# Altium PCB PCB.PcbDoc
Units mil, origin at the board's own origin, x right, y up, seen from the top; angles counter-clockwise.
Board outline 1650 x 4050 mil, 4 copper layers (Top Layer, VCC, GND, Bottom Layer), stack 63.228 mil thick; 28 components, 123 nets, 324 pads, 60 vias.
Unrouted connection lines stored in the file: 78.
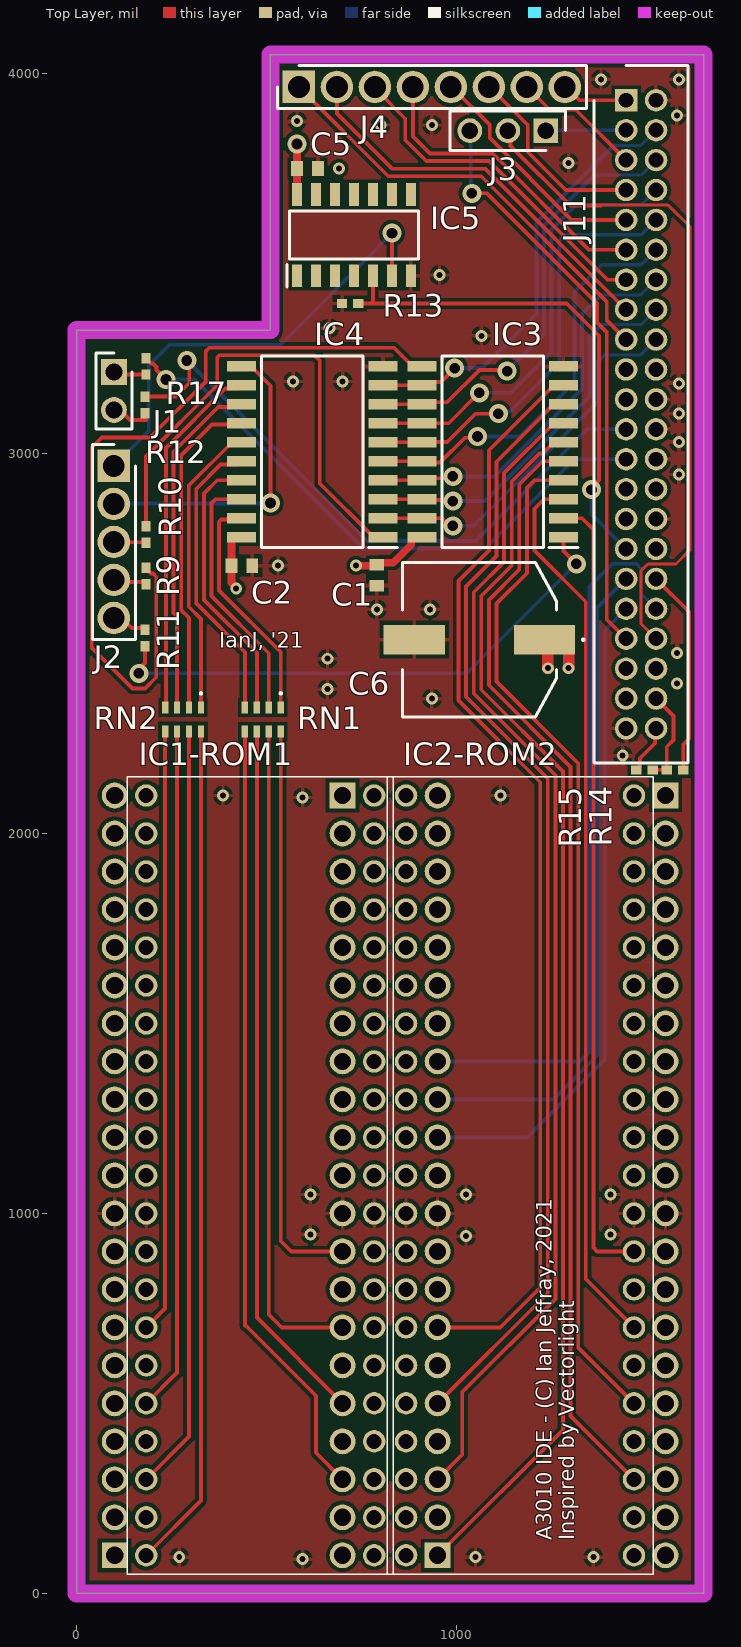
[diagram p0: Top Layer view]
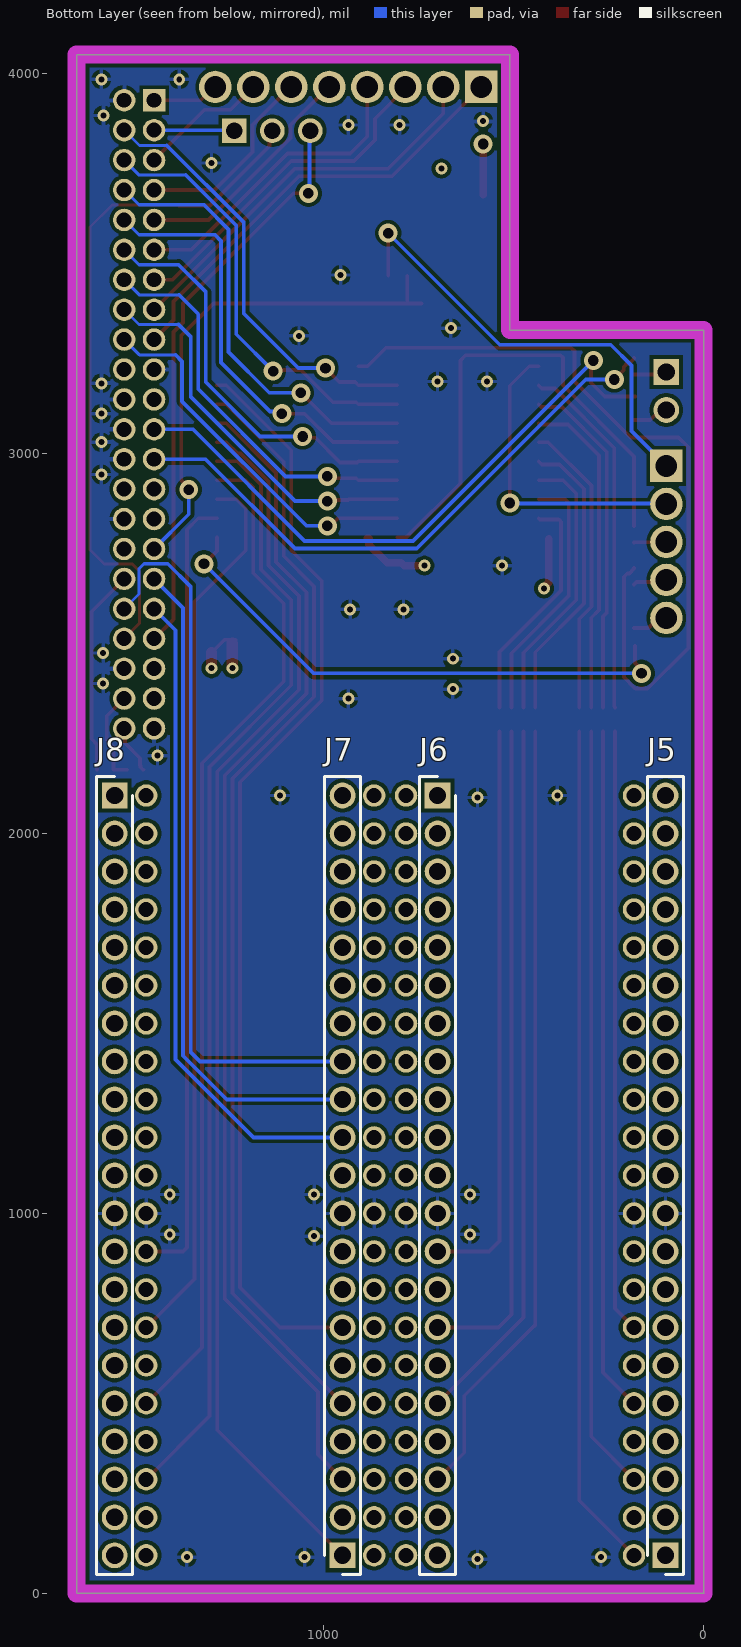
[diagram p1: Bottom Layer view, seen from below]
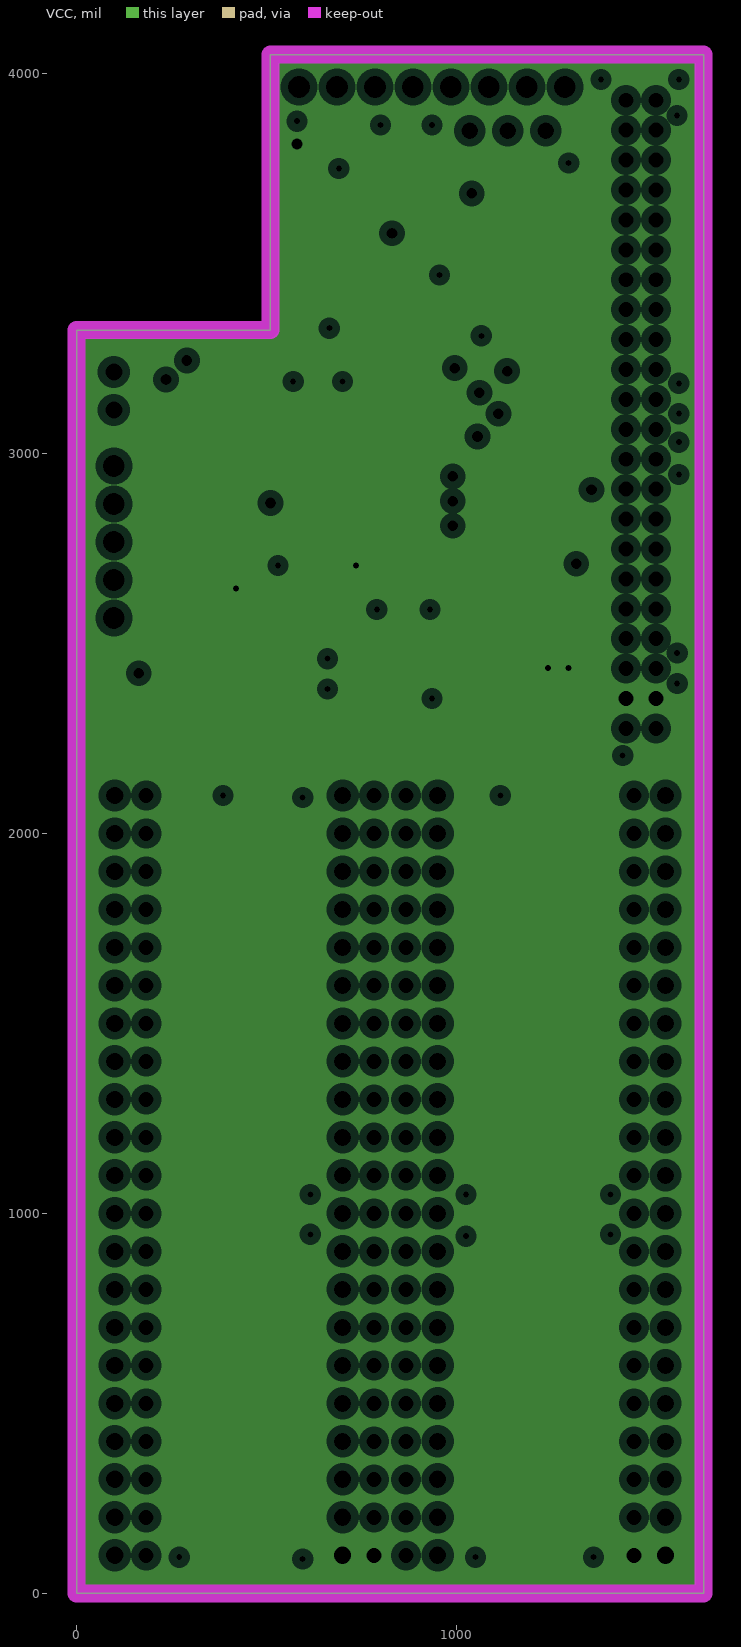
[diagram p2: VCC, clearances drawn from the general rule]
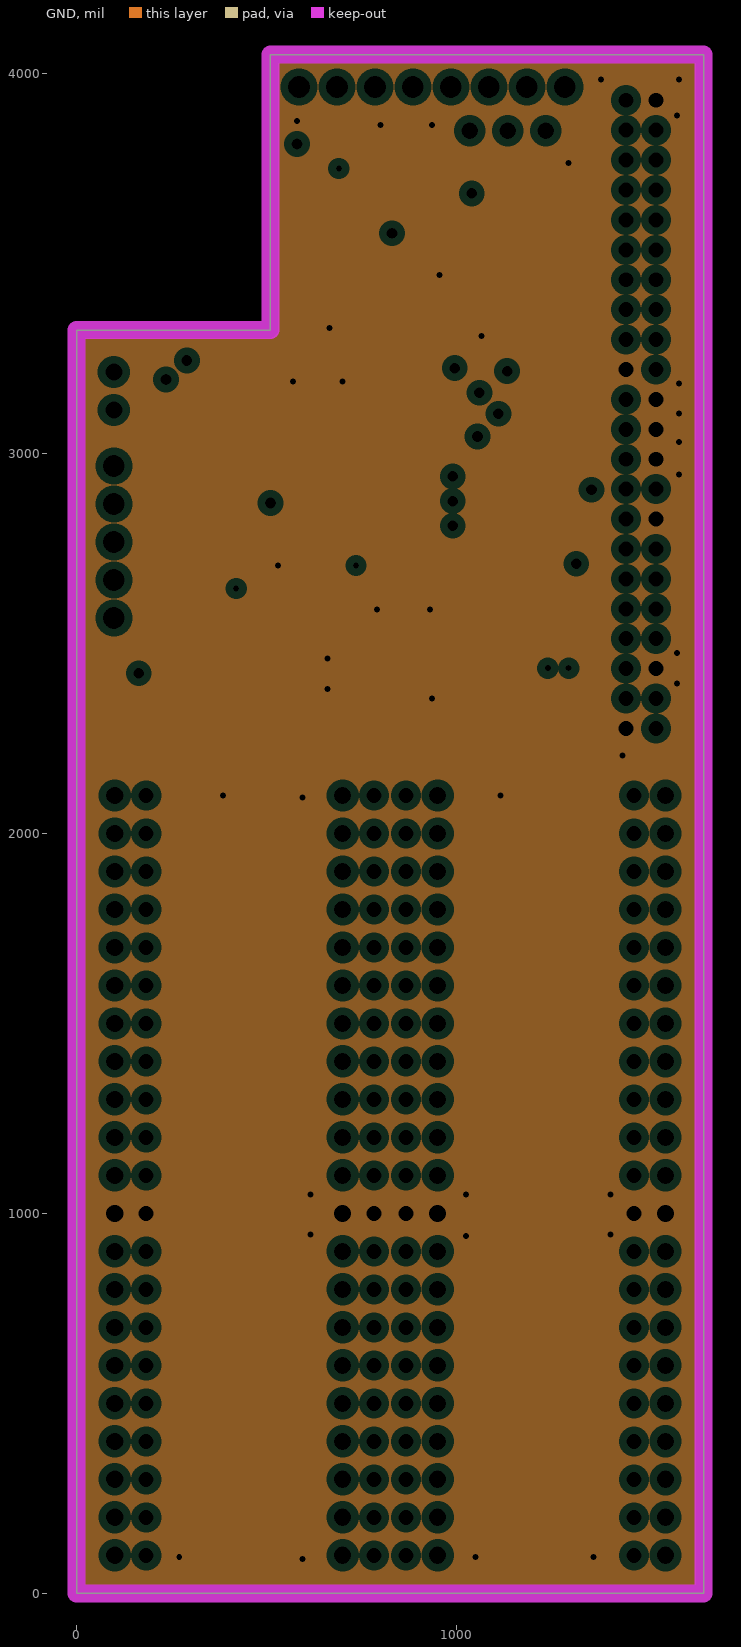
[diagram p3: GND, clearances drawn from the general rule]

## Layer stack, top to bottom
Top Solder: solder mask 0.4, Solder Resist, Dk 3.5
Top Layer: signal copper 1.378
Dielectric 2: prepreg 7.874, PP-006, Dk 4.1
VCC: plane copper 0.7087, net VCC
Dielectric 1: dielectric 43.307, FR-4, Dk 4.8
GND: plane copper 0.7087, net GND
Dielectric 3: prepreg 7.874, PP-006, Dk 4.1
Bottom Layer: signal copper 1.378
Bottom Solder: solder mask 0.4, Solder Resist, Dk 3.5

## Board outline
0,3325 510,3325 510,4050 1650,4050 1650,0 0,0

## Design rules (kind name [scope] priority, off if disabled: settings)
Clearance [All] p1: gap=10 ignorepadtopadclearanceinfootprint=FALSE except(0: Arc-Hole Track-Hole SMDPad-Hole THPad-Hole Via-Hole Fill-Hole Poly-Hole Region-Hole Text-Hole; 5: Arc-Arc Arc-Track Arc-THPad Track-Track Track-THPad)
ComponentClearance [All] p1: gap=5 collisioncheckmode=3 verticalgap=10 showdistances=FALSE
PlaneClearance [All] p1: clearance=20
PlaneConnect [All] p1: planeconnectstyle=Relief reliefexpansion=20 reliefentries=4 reliefconductorwidth=10 reliefairgap=10
PolygonConnect [All] p1: connectstyle=Relief reliefconductorwidth=10 reliefentries=4 polygonreliefangle="90 Angle" airgapwidth=10
RoomDefinition Sheet1 [InComponentClass('Sheet1')] p1: confinementstyle=ConfineIn formatcopy=TRUE lockcomponents=FALSE outline 1710,15 1885,15 1885,170 1710,170
RoutingVias [All] p1: holewidth=28 width=50 viastyle="Through Hole" minholewidth=28 minwidth=50 maxholewidth=28 maxwidth=50
SolderMaskExpansion [All] p1: expansion=4 istentingtop=FALSE
Width [All] p1: maxlimit=10 minlimit=5 preferedwidth=10 minimp=50.000000 maximp=50.000000 favimp=50.000000
27 further rules are at their usual default settings.

## Classes and differential pairs
net class BD[8..15]: BD8 BD9 BD10 BD11 BD12 BD13 BD14 BD15

## Components (designator, comment, footprint, x,y, rotation, side; value= is the part's Value field where it differs from the comment)
C1 "06033C104KAT4A" CAPC1608X90N 790,2680 r270 top
C2 "06033C104KAT4A" CAPC1608X90N 435,2705 r180 top
C5 "06033C104KAT4A" CAPC1608X90N 607.56,3750 r180 top
C6 "EEE-FC1H470P" EEEFK1V331P 1060,2510 r90 top
IC1-ROM1 "4842-6000-CP" 48426000CP 183,2100 r270 top locked
IC2-ROM2 "4842-6000-CP" 48426000CP 867,2100 r270 top locked
IC3 "74HC573D,653" SOIC127P1032X265-20N 1095,3005 r180 top
IC4 "74HCT573D,653" SOIC127P1032X265-20N 620,3005 r180 top
IC5 "74HCT14D-Q100,118" SOIC127P600X175-14N 730,3575 r90 top
J1 "68001-102HLF" HDRV2W67P0X254_1X2_508X241X858P 98.01,3214.83 r270 top locked
J2 "68001-105HLF" HDRV5W90P0X254_1X5_1270X241X1143P 97.74,2967.43 r270 top locked
J3 "861400031YO8LF" HDRV3W63P0X254_1X3_762X254X980P 1235,3850 r180 top
J4 "68001-108HLF" HDRV8W90P0X254_1X8_2032X241X1143P 585,3965 r0 top locked
J5 "68001-121HLF" HDRV21W67P0X254_1X21_5334X241X858P 100,100 r90 bottom locked
J6 "68001-121HLF" HDRV21W67P0X254_1X21_5334X241X858P 700,2100 r270 bottom locked
J7 "68001-121HLF" HDRV21W67P0X254_1X21_5334X241X858P 950,100 r90 bottom locked
J8 "68001-121HLF" HDRV21W67P0X254_1X21_5334X241X858P 1550,2100 r270 bottom locked
J11 "87831-4420" SHDR44W55P200_2X22_4665X630X640P 1446.26,3930 r270 top locked
R9 "CRCW040233R0FKEDC" RESC1005X35N 182.74,2677.43 r270 top
R10 "CRCW040233R0FKEDC" RESC1005X35N 182.74,2787.43 r270 top
R11 "CRCW040233R0FKEDC" RESC1005X35N 180,2515 r90 top
R12 "CRCW04022R87FNED" RESC1005X40N 180,3128.35 r90 top
R13 "CRCW0402110KFKTD" RESC1005X40N 720,3395 r0 top
R14 "CRCW0402110KFKTD" RESC1005X40N 1575,2167 r180 top
R15 "CRCW040214K7FKED" RESC1005X40N 1495,2167 r0 top
R17 "CRCW04022R87FNED" RESC1005X40N 183.01,3229.83 r90 top
RN1 "CAT16-68R0F4LF" CAT1668R0F4LF 490,2300 r180 top
RN2 "CAT16-68R0F4LF" CAT1668R0F4LF 280,2300 r180 top

## Footprints (in the part's own frame and the unit in brackets; to place one, negate y for a bottom-side part, rotate by r counter-clockwise, add the part's x,y. Pads: shape width x height; smd on the part's side, far side on the other; paste and mask are expansions set on the pad)
48426000CP [mm]
  round 1.5 hole 1: 1(0,0) 2(2.54,0) 3(5.08,0) 4(7.62,0) 5(10.16,0) 6(12.7,0) 7(15.24,0) 8(17.78,0) 9(20.32,0) 10(22.86,0) 11(25.4,0) 12(27.94,0) 13(30.48,0) 14(33.02,0) 15(35.56,0) 16(38.1,0) 17(40.64,0) 18(43.18,0) 19(45.72,0) 20(48.26,0) 21(50.8,0) 22(50.8,15.24) 23(48.26,15.24) 24(45.72,15.24) 25(43.18,15.24) 26(40.64,15.24) 27(38.1,15.24) 28(35.56,15.24) 29(33.02,15.24) 30(30.48,15.24) 31(27.94,15.24) 32(25.4,15.24) 33(22.86,15.24) 34(20.32,15.24) 35(17.78,15.24) 36(15.24,15.24) 37(12.7,15.24) 38(10.16,15.24) 39(7.62,15.24) 40(5.08,15.24) 41(2.54,15.24) 42(0,15.24)
  silkscreen extent -1.27,-1.27 52.07,16.51, body extent -1.27,-1.27 52.07,16.51, height 5.43
CAPC1608X90N [mm]
  rect 0.78x0.99 smd: 1(-0.7,0) 2(0.7,0)
  body extent -0.8,-0.41 0.8,0.41, height 0.9
CAT1668R0F4LF [mm]
  rect 0.425x0.8 smd: 1(-1.2,-0.8) 2(-0.4,-0.8) 3(0.4,-0.8) 4(1.2,-0.8) 5(1.2,0.8) 6(0.4,0.8) 7(-0.4,0.8) 8(-1.2,0.8)
  silkscreen extent -1.25,-1.8 -1.15,-1.7, body extent -1.6,-1.16 1.6,1.16, height 0.7
EEEFK1V331P [mm]
  rect 2x4.1 smd: 1(0,-4.35) 2(0,4.35)
  silkscreen extent -5.15,-7 5.15,5.15, body extent -5.15,-5.85 5.15,5.85, height 10.3
HDRV2W67P0X254_1X2_508X241X858P [mm]
  rect 1.725x1.725 hole 1.15: 1(0,0)
  round 1.725 hole 1.15: 2(2.54,0)
  silkscreen extent -1.27,-1.2 3.81,1.2, body extent -1.27,-1.2 3.81,1.2, height 8.58
HDRV3W63P0X254_1X3_762X254X980P [mm]
  rect 1.65x1.65 hole 1.1: 1(0,0)
  round 1.65 hole 1.1: 2(2.54,0) 3(5.08,0)
  silkscreen extent -1.32,-1.32 6.4,1.32, body extent -1.27,-1.27 6.35,1.27, height 9.8
HDRV5W90P0X254_1X5_1270X241X1143P [mm]
  rect 2.175x2.175 hole 1.45: 1(0,0)
  round 2.175 hole 1.45: 2(2.54,0) 3(5.08,0) 4(7.62,0) 5(10.16,0)
  silkscreen extent -1.44,-1.44 11.6,1.44, body extent -1.27,-1.2 11.43,1.2, height 11.43
HDRV8W90P0X254_1X8_2032X241X1143P [mm]
  rect 2.175x2.175 hole 1.45: 1(0,0)
  round 2.175 hole 1.45: 2(2.54,0) 3(5.08,0) 4(7.62,0) 5(10.16,0) 6(12.7,0) 7(15.24,0) 8(17.78,0)
  silkscreen extent -1.44,-1.44 19.22,1.44, body extent -1.27,-1.2 19.05,1.2, height 11.43
HDRV21W67P0X254_1X21_5334X241X858P [mm]
  rect 1.725x1.725 hole 1.15: 1(0,0)
  round 1.725 hole 1.15: 2(2.54,0) 3(5.08,0) 4(7.62,0) 5(10.16,0) 6(12.7,0) 7(15.24,0) 8(17.78,0) 9(20.32,0) 10(22.86,0) 11(25.4,0) 12(27.94,0) 13(30.48,0) 14(33.02,0) 15(35.56,0) 16(38.1,0) 17(40.64,0) 18(43.18,0) 19(45.72,0) 20(48.26,0) 21(50.8,0)
  silkscreen extent -1.27,-1.2 52.07,1.2, body extent -1.27,-1.21 52.07,1.2, height 8.58
RESC1005X35N [mm]
  rect 0.7x0.6 smd: 1(-0.55,0) 2(0.55,0)
  body extent -0.5,-0.25 0.5,0.25, height 0.35
RESC1005X40N [mm]
  rect 0.7x0.6 smd: 1(-0.55,0) 2(0.55,0)
  body extent -0.5,-0.25 0.5,0.25, height 0.4
SHDR44W55P200_2X22_4665X630X640P [mm]
  rect 1.5x1.5 hole 1: 1(0,0)
  round 1.5 hole 1: 2(0,2) 3(2,0) 4(2,2) 5(4,0) 6(4,2) 7(6,0) 8(6,2) 9(8,0) 10(8,2) 11(10,0) 12(10,2) 13(12,0) 14(12,2) 15(14,0) 16(14,2) 17(16,0) 18(16,2) 19(18,0) 20(18,2) 21(20,0) 22(20,2) 23(22,0) 24(22,2) 25(24,0) 26(24,2) 27(26,0) 28(26,2) 29(28,0) 30(28,2) 31(30,0) 32(30,2) 33(32,0) 34(32,2) 35(34,0) 36(34,2) 37(36,0) 38(36,2) 39(38,0) 40(38,2) 41(40,0) 42(40,2) 43(42,0) 44(42,2)
  silkscreen extent -2.32,-2.15 44.32,4.15, body extent -2.32,-2.15 44.33,4.15, height 6.2
SOIC127P600X175-14N [mm]
  rect 1.525x0.65 smd: 1(-2.712,3.81) 2(-2.712,2.54) 3(-2.712,1.27) 4(-2.712,0) 5(-2.712,-1.27) 6(-2.712,-2.54) 7(-2.712,-3.81) 8(2.712,-3.81) 9(2.712,-2.54) 10(2.712,-1.27) 11(2.712,0) 12(2.712,1.27) 13(2.712,2.54) 14(2.712,3.81)
  silkscreen extent -3.47,-4.33 1.6,4.48, body extent -3,-4.33 3,4.33, height 1.75
SOIC127P1032X265-20N [mm]
  rect 1.95x0.7 smd: 1(-4.725,5.715) 2(-4.725,4.445) 3(-4.725,3.175) 4(-4.725,1.905) 5(-4.725,0.635) 6(-4.725,-0.635) 7(-4.725,-1.905) 8(-4.725,-3.175) 9(-4.725,-4.445) 10(-4.725,-5.715) 11(4.725,-5.715) 12(4.725,-4.445) 13(4.725,-3.175) 14(4.725,-1.905) 15(4.725,-0.635) 16(4.725,0.635) 17(4.725,1.905) 18(4.725,3.175) 19(4.725,4.445) 20(4.725,5.715)
  silkscreen extent -5.7,-6.4 3.4,6.42, body extent -5.16,-6.4 5.16,6.4, height 2.65

## Part data
C1 C2 C5: "Capacitor", Manufacturer_Name=AVX, Mouser Part Number=581-06033C104KAT4A, Arrow Part Number=06033C104KAT4A, Arrow Price/Stock=https://www.arrow.com/en/products/06033c104kat4a/avx?region=nac, Datasheet Link=http://www.mouser.com/catalog/supplier/library/pdf/AVXSurfaceMountCeramic.pdf, Height=0.9mm, Manufacturer_Part_Number=06033C104KAT4A, Mouser Price/Stock=https://www.mouser.co.uk/ProductDetail/AVX/06033C104KAT4A?qs=8C2chATdSPiv3E9zfPZulg%3D%3D
C6: "Capacitor Polarised", Manufacturer_Name=Panasonic, Mouser Part Number=667-EEE-FC1H470P, Datasheet Link=http://industrial.panasonic.com/cdbs/www-data/pdf/RDE0000/ABA0000C1172.pdf, Manufacturer_Part_Number=EEE-FC1H470P, Mouser Price/Stock=https://www.mouser.co.uk/ProductDetail/Panasonic/EEE-FC1H470P?qs=qE6bgDGEOCtEzZmCp2ET%2Fg%3D%3D
IC1-ROM1 IC2-ROM2: "Connector", Manufacturer_Name=3M, Mouser Part Number=517-4842-6000-CP, Datasheet Link=https://componentsearchengine.com/Datasheets/1/4842-6000-CP.pdf, Height=5.334mm, Manufacturer_Part_Number=4842-6000-CP, Mouser Price/Stock=https://www.mouser.com/Search/Refine.aspx?Keyword=517-4842-6000-CP
IC3: "Integrated Circuit", Manufacturer_Name=Nexperia, Mouser Part Number=771-74HC573D-T, Arrow Part Number=74HC573D,653, Arrow Price/Stock=https://www.arrow.com/en/products/74hc573d653/nexperia?region=asia, Datasheet Link=https://assets.nexperia.com/documents/data-sheet/74HC_HCT573.pdf, Height=2.65mm, Manufacturer_Part_Number=74HC573D,653, Mouser Price/Stock=https://www.mouser.co.uk/ProductDetail/Nexperia/74HC573D653?qs=P62ublwmbi8WfKX2wZR8SA%3D%3D
IC4: "Integrated Circuit", Manufacturer_Name=Nexperia, Mouser Part Number=771-HCT573D653, Arrow Part Number=74HCT573D,653, Arrow Price/Stock=https://www.arrow.com/en/products/74hct573d653/nexperia, Datasheet Link=https://assets.nexperia.com/documents/data-sheet/74HC_HCT573.pdf, Height=2.65mm, Manufacturer_Part_Number=74HCT573D,653, Mouser Price/Stock=https://www.mouser.co.uk/ProductDetail/Nexperia/74HCT573D653?qs=me8TqzrmIYW0cewPmm%252By%2Fg%3D%3D
IC5: "Integrated Circuit", Manufacturer_Name=Nexperia, Mouser Part Number=771-74HCT14D-Q100118, Arrow Part Number=74HCT14D-Q100,118, Arrow Price/Stock=https://www.arrow.com/en/products/74hct14d-q100118/nexperia?region=nac, Datasheet Link=https://assets.nexperia.com/documents/data-sheet/74HC_HCT14_Q100.pdf, Height=1.75mm, Manufacturer_Part_Number=74HCT14D-Q100,118, Mouser Price/Stock=https://www.mouser.com/Search/Refine.aspx?Keyword=771-74HCT14D-Q100118
J1: "Connector", Manufacturer_Name=Amphenol, Mouser Part Number=649-68001-102HLF, Arrow Part Number=68001-102HLF, Arrow Price/Stock=https://www.arrow.com/en/products/68001-102hlf/amphenol-fci, Datasheet Link=https://cdn.amphenol-icc.com/media/wysiwyg/files/drawing/68000.pdf, Height=8.58mm, Manufacturer_Part_Number=68001-102HLF, Mouser Price/Stock=https://www.mouser.co.uk/ProductDetail/Amphenol-FCI/68001-102HLF/?qs=U4OZ2mbKj8feu9tJlaXIaQ%3D%3D
J2: "Connector", Manufacturer_Name=Amphenol, Mouser Part Number=649-68001-105HLF, Arrow Part Number=68001-105HLF, Arrow Price/Stock=https://www.arrow.com/en/products/68001-105hlf/amphenol-fci, Datasheet Link=https://datasheet.datasheetarchive.com/originals/distributors/Datasheets_SAMA/c5633c0073cf34d35a9dcd840869dfda.pdf, Height=11.43mm, Manufacturer_Part_Number=68001-105HLF, Mouser Price/Stock=https://www.mouser.com/Search/Refine.aspx?Keyword=649-68001-105HLF
J3: "Connector", Manufacturer_Name=Amphenol, Mouser Part Number=649-861400031YO8LF, Arrow Part Number=861400031YO8LF, Arrow Price/Stock=https://www.arrow.com/en/products/861400031yo8lf/amphenol-fci, Datasheet Link=https://cdn.amphenol-icc.com/media/wysiwyg/files/drawing/c-8614-0089.pdf, Height=9.8mm, Manufacturer_Part_Number=861400031YO8LF, Mouser Price/Stock=https://www.mouser.com/Search/Refine.aspx?Keyword=649-861400031YO8LF
J4: "Connector", Manufacturer_Name=Amphenol, Mouser Part Number=649-68001-108HLF, Arrow Part Number=68001-108HLF, Arrow Price/Stock=https://www.arrow.com/en/products/68001-108hlf/amphenol-fci?region=nac, Datasheet Link=https://datasheet.datasheetarchive.com/originals/distributors/Datasheets_SAMA/c5633c0073cf34d35a9dcd840869dfda.pdf, Height=11.43mm, Manufacturer_Part_Number=68001-108HLF, Mouser Price/Stock=https://www.mouser.co.uk/ProductDetail/Amphenol-FCI/68001-108HLF?qs=QKvFUfBIyQKXzKR4Fn7cFQ%3D%3D
J5 J6 J7 J8: "Connector", Manufacturer_Name=Amphenol, Mouser Part Number=649-68001-121HLF, Arrow Part Number=68001-121HLF, Arrow Price/Stock=https://www.arrow.com/en/products/68001-121hlf/amphenol-fci?region=nac, Datasheet Link=https://datasheet.datasheetarchive.com/originals/distributors/Datasheets_SAMA/c5633c0073cf34d35a9dcd840869dfda.pdf, Height=8.58mm, Manufacturer_Part_Number=68001-121HLF, Mouser Price/Stock=https://www.mouser.co.uk/ProductDetail/Amphenol-FCI/68001-121HLF/?qs=QKvFUfBIyQK%252BoxmWjqVzjQ%3D%3D
J11: "Connector", Manufacturer_Name=Molex, Mouser Part Number=538-87831-4420, Datasheet Link=https://datasheet.datasheetarchive.com/originals/distributors/Datasheets-DGA22/2095109.pdf, Height=6.4mm, Manufacturer_Part_Number=87831-4420, Mouser Price/Stock=https://www.mouser.co.uk/ProductDetail/Molex/87831-4420?qs=tYx%252BZc2nXqqGnHzye8Wn9w%3D%3D
R9 R10 R11: "Resistor", Manufacturer_Name=Vishay, Mouser Part Number=71-CRCW040233R0FKEDC, Arrow Part Number=CRCW040233R0FKEDC, Arrow Price/Stock=https://www.arrow.com/en/products/crcw040233r0fkedc/vishay?region=nac, Datasheet Link=http://www.vishay.com/docs/28773/crcwce3.pdf, Height=0.35mm, Manufacturer_Part_Number=CRCW040233R0FKEDC, Mouser Price/Stock=https://www.mouser.co.uk/ProductDetail/Vishay-Dale/CRCW040233R0FKEDC?qs=E3Y5ESvWgWMDHctUwHh1hg%3D%3D
R12 R17: "Resistor", Manufacturer_Name=Vishay, Mouser Part Number=71-CRCW04022R87FNED, Datasheet Link=http://www.vishay.com/docs/20035/dcrcwe3.pdf, Height=0.4mm, Manufacturer_Part_Number=CRCW04022R87FNED, Mouser Price/Stock=https://www.mouser.com/Search/Refine.aspx?Keyword=71-CRCW04022R87FNED
R13 R14: "Resistor", Manufacturer_Name=Vishay, Mouser Part Number=71-CRCW0402-110K, Arrow Part Number=CRCW0402110KFKTD, Arrow Price/Stock=https://www.arrow.com/en/products/crcw0402110kfktd/vishay, Datasheet Link=http://www.vishay.com/docs/20035/dcrcwe3.pdf, Height=0.4mm, Manufacturer_Part_Number=CRCW0402110KFKTD, Mouser Price/Stock=https://www.mouser.co.uk/ProductDetail/Vishay-Dale/CRCW0402110KFKTD/?qs=uFJqmf%2F3rbaGBLbzqPTJ0w%3D%3D
R15: "Resistor", Manufacturer_Name=Vishay, Mouser Part Number=71-CRCW0402-14.7K-E3, Datasheet Link=http://www.vishay.com/docs/20035/dcrcwe3.pdf, Height=0.4mm, Manufacturer_Part_Number=CRCW040214K7FKED, Mouser Price/Stock=https://www.mouser.com/Search/Refine.aspx?Keyword=71-CRCW0402-14.7K-E3
RN1 RN2: "Resistor Network", Manufacturer_Name=Bourns, Mouser Part Number=652-CAT16-68R0F4LF, Datasheet Link=https://www.mouser.com/datasheet/2/54/CATCAY-777361.pdf, Height=0.6mm, Manufacturer_Part_Number=CAT16-68R0F4LF, Mouser Price/Stock=https://www.mouser.co.uk/ProductDetail/Bourns/CAT16-68R0F4LF?qs=2cU%252Bdy8NdRpfh4EnG7Hj3A%3D%3D

## Via types
v1: diameter 31.5, hole 15.75, Top Layer to Bottom Layer, 43 vias
v2: diameter 50, hole 28, Top Layer to Bottom Layer, 17 vias

## Nets (pads, with @x,y where several pads share a name; then routed paths per layer and width w, separated by ;. In a path a pad name is that pad's centre, name@x,y a point inside that pad or via, vN(x,y) a via of type N, cw(c..) or ccw(c..) an arc to the next point about the centre after c; other vN are vias at no path point)
BD0: J4.1 J11.17 | length 1165.2
  Top Layer w10: J4.1 820,3730 1065,3730 1395,3400 1395,3351.34 J11.17
BD1: J4.2 J11.15 | length 1045.1
  Top Layer w10: J4.2 685,3895 830,3750 1075.08,3750 J11.15
BD2: J4.3 J11.13 | length 906.6
  Top Layer w10: J4.3 785,3961.52 865,3881.52 865,3825 920,3770 1085,3770 1397.44,3457.56 J11.13
BD3: J4.4 J11.11 | length 815
  Top Layer w10: J4.4 885,3835 930,3790 1095,3790 1348.7,3536.3 J11.11
BD4: J4.5 J11.9 | length 626.3
  Top Layer w10: J4.5 987.15,3965 1087.52,3864.63 1087.52,3830.33 1302.81,3615.04 J11.9
BD5: J4.6 J11.7 | length 515.3
  Top Layer w10: J4.6 1087.15,3965 1187.52,3864.63 1187.52,3793.48 1287.22,3693.78 J11.7
BD6: J4.7 J11.5 | length 341
  Top Layer w10: J4.7 1245,3905 1313.78,3905 J11.5
BD8: IC3.12 IC4.9 J11.4 | length 1137.6
  Top Layer w10: IC4.9 IC3.12 917.76,3188.78 958.78,3188.78 v2(995,3225)
  Bottom Layer w8: 1413.03,3811.03 1444.99,3811.03 cw(c1446.26,3772.52) 1447.53,3811.03 1484.77,3811.03 J11.4
  Bottom Layer w10: v2(995,3225) 1067,3225 1210,3368 1210,3608 1413.03,3811.03
BD9: IC3.13 IC4.8 J11.6 | length 1155.1
  Top Layer w10: IC4.8 IC3.13 913.98,3135 975,3135 1060,3220 1130,3220 v2(1133,3217)
  Bottom Layer w8: 1363,3733 1485.48,3733 J11.6
  Bottom Layer w10: v2(1133,3217) 1230,3314 1230,3600 1363,3733
BD10: IC3.14 IC4.7 J11.8 | length 1162.4
  Top Layer w10: IC4.7 IC3.14 979.18,3080 1059.18,3160 v2(1060,3160)
  Bottom Layer w8: 1315,3655 1486.22,3655 J11.8
  Bottom Layer w10: v2(1060,3160) 1143,3160 1250,3267 1250,3590 1315,3655
BD11: IC3.15 IC4.6 J11.10 | length 1148.8
  Top Layer w10: IC4.6 IC3.15 909.56,3030.58 975.58,3030.58 1050,3105 v2(1110,3105)
  Bottom Layer w8: 1286,3576 1485.96,3576 J11.10
  Bottom Layer w10: v2(1110,3105) 1115.78,3110.78 1140.78,3110.78 1270,3240 1270,3560 1286,3576
BD12: IC3.16 IC4.5 J11.12 | length 1091.2
  Top Layer w10: IC4.5 IC3.16 912.47,2976.5 956.5,2976.5 1021.72,3041.72 1051.72,3041.72 v2(1055,3045)
  Bottom Layer w8: 1382,3497 1485.7,3497 J11.12
  Bottom Layer w10: v2(1055,3045) 1167.13,3045 1310,3187.87 1310,3425 1382,3497
BD13: IC3.17 IC4.4 J11.14 | length 1052.9
  Top Layer w10: IC4.4 IC3.17 913.98,2935 985,2935 v2(990,2940)
  Bottom Layer w8: 1381,3418 1485.44,3418 J11.14
  Bottom Layer w10: v2(990,2940) 1100,2940 1330,3170 1330,3367 1381,3418
BD14: IC3.18 IC4.3 J11.16 | length 1022.3
  Top Layer w10: IC4.3 IC3.18 933.58,2880 936.08,2877.5 987.5,2877.5 v2(990,2875)
  Bottom Layer w8: 1382,3340 1486.18,3340 J11.16
  Bottom Layer w10: v2(990,2875) 1075,2875 1350,3150 1350,3308 1382,3340
BD15: IC3.19 IC4.2 J11.18 | length 991.8
  Top Layer w10: IC4.2 IC3.19 962.36,2830 982.36,2810 v2(990,2810)
  Bottom Layer w8: 1390,3260 1484.92,3260 J11.18
  Bottom Layer w10: v2(990,2810) 1045,2810 1372.5,3137.5 1372.5,3242.5 1390,3260
Bpn: IC4.11 J2.2 | length 819.2
  Top Layer w10: IC4.11 458.58,3230 510,3178.58 v2(510,2870)
  Bottom Layer w10: J2.2 99.02,2868.71 508.71,2868.71 v2(510,2870)
D8: IC1-ROM1.15 J5.7 RN2.5 | length 1589.1
  Top Layer w10: IC1-ROM1.15 232.76,749.76 RN2.5
D9: IC1-ROM1.17 J5.5 RN2.6 | length 1802.2
  Top Layer w10: IC1-ROM1.17 264.25,581.25 RN2.6
D10: IC1-ROM1.19 J5.3 RN2.7 | length 2015.2
  Top Layer w10: IC1-ROM1.19 295.75,412.75 RN2.7
D11: IC1-ROM1.21 J5.1 RN2.8 | length 2228.3
  Top Layer w10: IC1-ROM1.21 327.24,244.24 RN2.8
D12: IC1-ROM1.24 J6.19 RN1.5 | length 2076.4
  Top Layer w10: RN1.5 442.76,705 445,705 630,520 630,370 J6.19
D13: IC1-ROM1.26 J6.17 RN1.6 | length 1862
  Top Layer w10: RN1.6 474.25,725.75 J6.17
D14: IC1-ROM1.28 J6.15 RN1.7 | length 1742.7
  Top Layer w10: RN1.7 505.75,734.25 540,700 J6.15
D15: IC1-ROM1.30 J6.13 RN1.8 | length 1515
  Top Layer w10: RN1.8 537.24,927.76 565,900 J6.13
D24: IC2-ROM2.15 IC3.9 J7.7 | length 2906.3
  Top Layer w10: J7.7 1115,700 1220,805 1220,2135 1005,2350 1005,2665 1085,2745 1085,3008.58 1256.42,3180 IC3.9
D25: IC2-ROM2.17 IC3.8 J7.5 | length 2959.6
  Top Layer w10: J7.5 1240,790 1240,2145 1025,2360 1025,2650 1105,2730 1105,2978.58 1256.42,3130 IC3.8
D26: IC2-ROM2.19 IC3.7 J7.3 | length 3109.6
  Top Layer w10: J7.3 1015,365 1015,530 1260,775 1260,2153.28 1045,2368.28 1045,2635 1125,2715 1125,2948.58 1256.42,3080 IC3.7
D27: IC2-ROM2.21 IC3.6 J7.1 | length 3264.3
  Top Layer w10: J7.1 1280,430 1280,2163.28 1065,2378.28 1065,2625 1145,2705 1145,2926.57 1218.43,3000 1226.42,3000 1256.42,3030 IC3.6
D28: IC2-ROM2.24 IC3.5 J8.19 | length 2951.2
  Top Layer w10: IC3.5 1226.72,2980 1165,2918.28 1165,2695 1085,2615 1085,2390 1300,2175 1300,467 IC2-ROM2.24
D29: IC2-ROM2.26 IC3.4 J8.17 | length 2697.4
  Top Layer w10: IC3.4 1205,2930 1185,2910 1185,2685 1105,2605 1105,2400 1320,2185 1320,647 IC2-ROM2.26
D30: IC2-ROM2.28 IC3.3 J8.15 | length 2349.9
  Top Layer w10: IC3.3 1230,2880 1205,2855 1205,2745 1340,2610 1340,827 IC2-ROM2.28
D31: IC2-ROM2.30 IC3.2 J8.13 | length 2092.5
  Top Layer w10: IC3.2 1330,2830 1360,2800 1360,910 1370,900 IC2-ROM2.30
E_Rben: J2.3 R10.2 | length 85.7
  Top Layer w10: J2.3 98.56,2766.6 181.91,2766.6 R10.2
E_Wben: J2.5 R11.2 | length 96
  Top Layer w10: J2.5 118.2,2567.43 144.86,2540.78 R11.2@182.74,2540.78
E_Wbln: J2.4 R9.2 | length 89.8
  Top Layer w10: J2.4 103.56,2661.6 176.91,2661.6 R9.2
GND: C1.2 C2.1 C5.1 C6.2 IC1-ROM1.12 IC1-ROM1.31 IC2-ROM2.12 IC2-ROM2.31 IC3.10 IC4.10 IC5.7 J5.10 J6.12 J7.10 J8.12 J11.2 J11.19 J11.22 J11.24 J11.26 J11.30 J11.40 J11.43 R13.1
  other v1: 595,90 270,95 1050,95 1360,95 1025,940 615,945 1405,945 615,1050 1025,1050 1405,1050 595,2095 385,2100 1115,2100 1437.33,2205 935,2355 660,2380 1580.63,2395 660,2460 1580.63,2475 790,2590 930,2590 530,2705 1585,2945 1585,3030 1585,3105 1585,3185 570,3190 700,3190 1065,3310 665,3330 955,3470 1295,3765 800,3865 935,3865 580,3875 1580,3890 1380,3985 1585,3985
HDsc0n: J3.3 J11.37 | length 1531.1
  Top Layer w10: v2(1040,3685) 1080,3685 1370,3395 1370,3345 1395,3320 1395,2563.94 1397.93,2561.01 J11.37
  Bottom Layer w10: J3.3 1037.5,3847.5 1037.5,3687.5 v2(1040,3685)
HDsc1n: J3.2 J11.38 | length 1802.2
  Top Layer w8: 1381,3653 1382,3654 1557,3654 1614.75,3596.25 1614.75,2746.75 1577.53,2709.53 1503.53,2709.53 1485,2691 1485,2552.68 J11.38
  Top Layer w10: J3.2 1142.07,3842.93 1142.07,3809.93 1299,3653 1381,3653
I_IntRq: IC5.5 J11.31 R13.2 | length 1351.4
  Top Layer w10: R13.2 774.14,3395 ; IC5.5 780,3400.86 774.14,3395 ; v2(1355,2905) 1355,2910.86 1375,2930.86 1375,3310 1290,3395 774.14,3395
  Bottom Layer w10: v2(1355,2905) 1355,2840.16 J11.31
I_IORn: J11.25 R17.2 | length 1574.2
  Top Layer w10: R17.2 183.01,3249.51 195.57,3236.95 201.03,3236.95 209.82,3228.17 209.82,3220.18 v2(235,3195)
  Bottom Layer w10: v2(235,3195) 310,3195 755,2750 1075.65,2750 1310.77,2985.12 J11.25
I_IOWn: J11.23 R12.2 | length 1667.6
  Top Layer w10: R12.2 260,3150 296.57,3186.57 296.57,3238.43 v2(290,3245)
  Bottom Layer w10: v2(290,3245) 765,2770 1050,2770 1343.86,3063.86 J11.23
IDEd7: J3.1 J11.3 | length 211.8
  Bottom Layer w10: J3.1 1236.26,3851.26 J11.3
IOCSn: J11.32
IORn: J1.1 R17.1 | length 87.8
  Top Layer w10: J1.1 104.66,3208.17 R17.1
IOWn: J1.2 R12.1 | length 96
  Top Layer w10: J1.2 113.68,3114.83 140.33,3088.17 183.01,3088.17
Ip3n: IC5.6 J2.1 | length 1198.9
  Top Layer w10: IC5.6 v2(830,3580)
  Bottom Layer w10: J2.1 189.79,3059.48 189.79,3232.14 244.02,3286.38 536.38,3286.38 v2(830,3580)
LA2: IC2-ROM2.10 J7.12 J11.35 | length 1734.6
  Bottom Layer w10: J7.12 1185,1200 1390,1405 1390,2535.16 J11.35
LA3: IC2-ROM2.9 J7.13 J11.33 | length 1754.4
  Bottom Layer w10: J7.13 1255,1300 1370,1415 1370,2593.9 J11.33
LA4: IC2-ROM2.8 J7.14 J11.36 | length 1923.3
  Bottom Layer w8: 1410.12,2710 1473,2710 1486,2697 1486,2630.42 J11.36
  Bottom Layer w10: J7.14 1325,1400 1350,1425 1350,2649.88 1410.12,2710
NetIC1-ROM1_1: IC1-ROM1.1 J5.21
NetIC1-ROM1_2: IC1-ROM1.2 J5.20
NetIC1-ROM1_3: IC1-ROM1.3 J5.19
NetIC1-ROM1_4: IC1-ROM1.4 J5.18
NetIC1-ROM1_5: IC1-ROM1.5 J5.17
NetIC1-ROM1_6: IC1-ROM1.6 J5.16
NetIC1-ROM1_7: IC1-ROM1.7 J5.15
NetIC1-ROM1_8: IC1-ROM1.8 J5.14
NetIC1-ROM1_9: IC1-ROM1.9 J5.13
NetIC1-ROM1_10: IC1-ROM1.10 J5.12
NetIC1-ROM1_11: IC1-ROM1.11 J5.11
NetIC1-ROM1_13: IC1-ROM1.13 J5.9
NetIC1-ROM1_14: IC1-ROM1.14 J5.8
NetIC1-ROM1_16: IC1-ROM1.16 J5.6
NetIC1-ROM1_18: IC1-ROM1.18 J5.4
NetIC1-ROM1_20: IC1-ROM1.20 J5.2
NetIC1-ROM1_23: IC1-ROM1.23 J6.20
NetIC1-ROM1_25: IC1-ROM1.25 J6.18
NetIC1-ROM1_27: IC1-ROM1.27 J6.16
NetIC1-ROM1_29: IC1-ROM1.29 J6.14
NetIC1-ROM1_32: IC1-ROM1.32 J6.11
NetIC1-ROM1_33: IC1-ROM1.33 J6.10
NetIC1-ROM1_34: IC1-ROM1.34 J6.9
NetIC1-ROM1_35: IC1-ROM1.35 J6.8
NetIC1-ROM1_36: IC1-ROM1.36 J6.7
NetIC1-ROM1_37: IC1-ROM1.37 J6.6
NetIC1-ROM1_38: IC1-ROM1.38 J6.5
NetIC1-ROM1_39: IC1-ROM1.39 J6.4
NetIC1-ROM1_40: IC1-ROM1.40 J6.3
NetIC1-ROM1_41: IC1-ROM1.41 J6.2
NetIC1-ROM1_42: IC1-ROM1.42 J6.1
NetIC2-ROM2_1: IC2-ROM2.1 J7.21
NetIC2-ROM2_2: IC2-ROM2.2 J7.20
NetIC2-ROM2_3: IC2-ROM2.3 J7.19
NetIC2-ROM2_4: IC2-ROM2.4 J7.18
NetIC2-ROM2_5: IC2-ROM2.5 J7.17
NetIC2-ROM2_6: IC2-ROM2.6 J7.16
NetIC2-ROM2_7: IC2-ROM2.7 J7.15
NetIC2-ROM2_11: IC2-ROM2.11 J7.11
NetIC2-ROM2_13: IC2-ROM2.13 J7.9
NetIC2-ROM2_14: IC2-ROM2.14 J7.8
NetIC2-ROM2_16: IC2-ROM2.16 J7.6
NetIC2-ROM2_18: IC2-ROM2.18 J7.4
NetIC2-ROM2_20: IC2-ROM2.20 J7.2
NetIC2-ROM2_23: IC2-ROM2.23 J8.20
NetIC2-ROM2_25: IC2-ROM2.25 J8.18
NetIC2-ROM2_27: IC2-ROM2.27 J8.16
NetIC2-ROM2_29: IC2-ROM2.29 J8.14
NetIC2-ROM2_32: IC2-ROM2.32 J8.11
NetIC2-ROM2_33: IC2-ROM2.33 J8.10
NetIC2-ROM2_34: IC2-ROM2.34 J8.9
NetIC2-ROM2_35: IC2-ROM2.35 J8.8
NetIC2-ROM2_36: IC2-ROM2.36 J8.7
NetIC2-ROM2_37: IC2-ROM2.37 J8.6
NetIC2-ROM2_38: IC2-ROM2.38 J8.5
NetIC2-ROM2_39: IC2-ROM2.39 J8.4
NetIC2-ROM2_40: IC2-ROM2.40 J8.3
NetIC2-ROM2_41: IC2-ROM2.41 J8.2
NetIC2-ROM2_42: IC2-ROM2.42 J8.1
PDiag: J11.34 R14.1 | length 544
  Top Layer w10: J11.34 1611.38,2583.78 1611.38,2249.38 1596.65,2234.65 R14.1@1596.65,2168
Rben: IC4.1 R10.1 | length 1347.7
  Top Layer w10: R10.1 182.74,2992.74 370,3180 370,3252.92 375.86,3258.78 626.22,3258.78 640,3245 640,2921.42 781.42,2780 IC4.1
RD8: IC4.12 RN2.4 | length 951.8
  Top Layer w10: RN2.4 235,2333.74 235,3015 391.22,3171.22 425.2,3171.22 IC4.12
RD9: IC4.13 RN2.3 | length 908.1
  Top Layer w10: RN2.3 264.25,2570.9 255,2580.15 255,3005 372.8,3122.8 426.78,3122.8 IC4.13
RD10: IC4.14 RN2.2 | length 866.3
  Top Layer w10: RN2.2 295.75,2567.68 275,2588.43 275,2995 356.45,3076.45 430.42,3076.45 IC4.14
RD11: IC4.15 RN2.1 | length 783.8
  Top Layer w10: RN2.1 327.24,2564.47 295,2596.72 295,2915.63 409.37,3030 IC4.15
RD12: IC4.16 RN1.4 | length 777.8
  Top Layer w10: IC4.16 425.2,2971.22 378.87,2971.22 315,2907.35 315,2605 442.76,2477.24 RN1.4
RD13: IC4.17 RN1.3 | length 734.7
  Top Layer w10: IC4.17 370,2930 335,2895 335,2615 474.25,2475.75 RN1.3
RD14: IC4.18 RN1.2 | length 684.1
  Top Layer w10: IC4.18 365,2880 355,2870 355,2625 505.75,2474.25 RN1.2
RD15: IC4.19 RN1.1 | length 619.2
  Top Layer w10: IC4.19 430.42,2826.45 380.86,2826.45 375,2820.59 375,2640 537.24,2477.76 RN1.1
RSTn: J4.8 J11.1 | length 175.8
  Top Layer w10: J4.8 1288.48,3965 1323.48,3930 J11.1
Type: J11.44 R15.1 | length 131
  Top Layer w10: R15.1@1473.35,2168 1475.32,2168 1482.13,2174.81 1482.13,2179.8 1483,2180.67 1483,2198 1522.79,2237.79 1522.79,2274.24 J11.44
VCC: C1.1 C2.2 C5.2 C6.1 IC1-ROM1.22 IC2-ROM2.22 IC3.20 IC4.20 IC5.14 J6.21 J8.21 J11.41 J11.42 R14.2 R15.2 | length 906.2
  Top Layer w10: C1.1@787.44,2705 C1.1 ; C6.1@1240,2501.26 C6.1 1260.63,2510 C6.1@1295,2475.63 ; R15.2@1516.65,2168 1553.35,2168 1553.35,2228.23 1571,2245.88 1571,2309.2 J11.42
  Top Layer w20: IC4.20@407.44,2776.22 407.44,2660.67 420,2648.11 v1(420,2645) ; IC5.14 C5.2 v2(580,3815) ; v1(735,2705) C1.1@787.44,2705 ; C1.1 795.35,2712.91 832.91,2712.91 880.59,2760.59 880.59,2776.22 881.84,2777.47 IC3.20@884.88,2777.47
  Top Layer w30: v1(1240,2435) C6.1@1240,2501.26 ; v1(1295,2435) C6.1@1295,2475.63
Wben: IC3.1 R11.1 | length 1433.6
  Top Layer w10: v2(163.42,2421.7) 163.42,2432.52 180,2449.1 R11.1 ; IC3.1 1281.02,2743.98 v2(1315,2710)
  Bottom Layer w10: v2(163.42,2421.7) 1026.7,2421.7 v2(1315,2710)
Wbln: IC3.11 R9.1 | length 2100.9
  Top Layer w10: R9.1 182.74,2697.11 195.3,2684.56 200.76,2684.56 209.55,2675.77 209.55,2411.25 179.99,2381.7 146.85,2381.7 39.92,2488.63 39.92,3016.46 65.78,3042.32 192.32,3042.32 340,3190 340,3270 348.78,3278.78 835.59,3278.78 884.37,3230 IC3.11
pads on no net: IC5.1 IC5.2 IC5.3 IC5.4 IC5.8 IC5.9 IC5.10 IC5.11 IC5.12 IC5.13 J11.20 J11.21 J11.27 J11.28 J11.29 J11.39
copper on no net:
  other v1: 690,3750

## Polygon pours and split planes (outlines as drawn)
GND on Bottom Layer "GND_L04_P001" (solid, remove dead copper, pour order 1): 0,0 1650,0 1650,4050 510,4050 510,3325 0,3325
GND on Top Layer "GND_L01_P000" (solid, remove dead copper, pour order 0): 0,0 1650,0 1650,4050 510,4050 510,3325 0,3325
GND on GND (split plane): 1629.9,20.1 20.1,20.1 20.1,3304.9 510,3304.9 513.92,3305.29 517.69,3306.43 521.17,3308.29 524.21,3310.79 526.71,3313.83 528.57,3317.31 529.71,3321.08 530.1,3325 530.1,4029.9 1629.9,4029.9
VCC on VCC (split plane): 1629.9,20.1 20.1,20.1 20.1,3304.9 510,3304.9 513.92,3305.29 517.69,3306.43 521.17,3308.29 524.21,3310.79 526.71,3313.83 528.57,3317.31 529.71,3321.08 530.1,3325 530.1,4029.9 1629.9,4029.9

## Keep-outs
Keep-Out Layer:
  the board outline again, w47.24

## Silkscreen, mask and mechanical layers (free items; w line width, h text height)
Top Overlay:
  text "IanJ, '21" at 375,2488.33 h40
  text "A3010 IDE - (C) Ian Jeffray, 2021 / Inspired by Vectorlight" at 1310,140 h40 r90